# Altium PCB saw_filter_pcb.PcbDoc
Units mm, origin at the board's own origin, x right, y up, seen from the top; angles counter-clockwise.
Board outline 40.2 x 15.3 mm, 2 copper layers (Top Layer, Bottom Layer), stack 1.671 mm thick; 16 components, 10 nets, 46 pads, 94 vias.
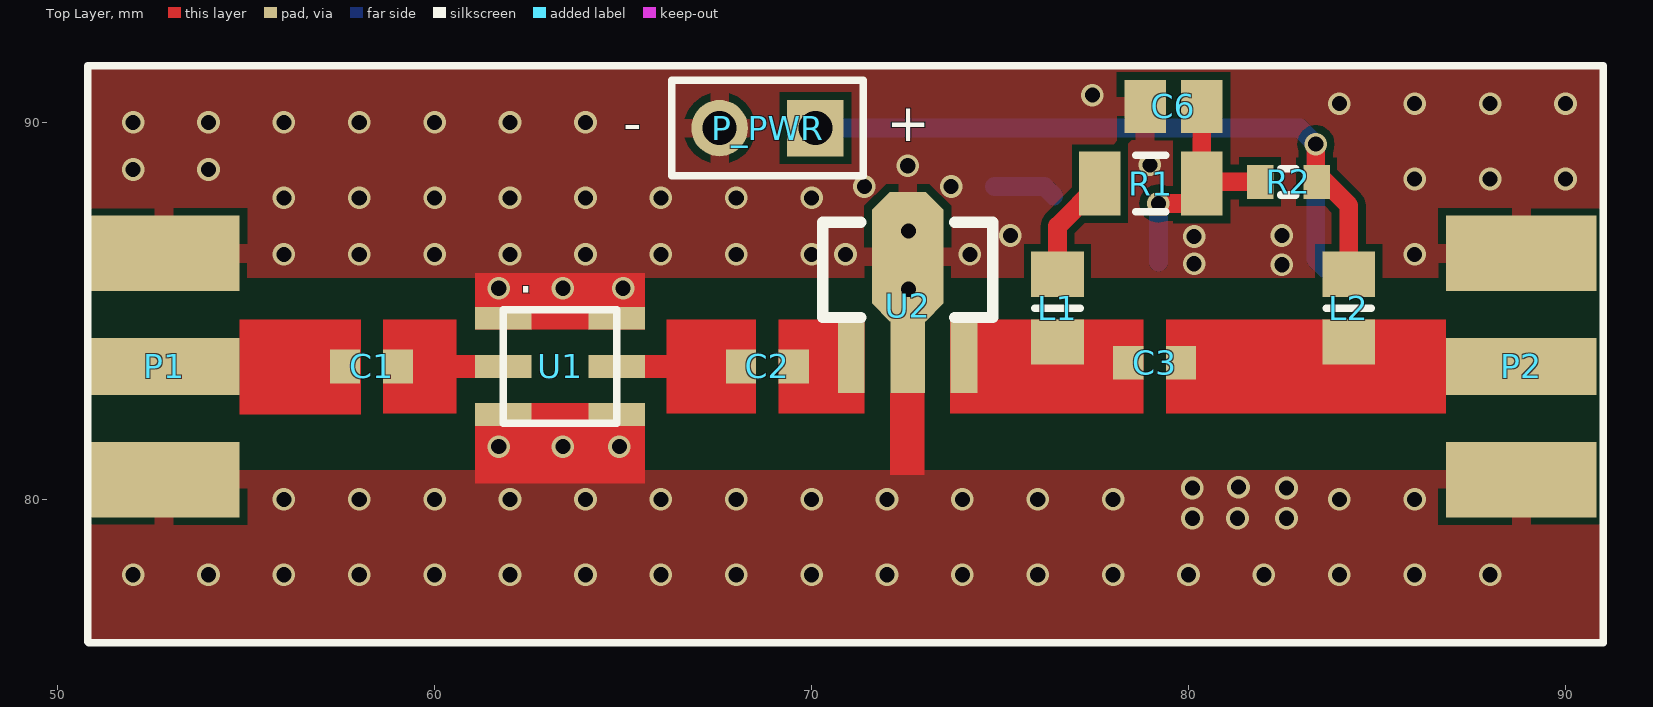
[diagram p0: Top Layer view]
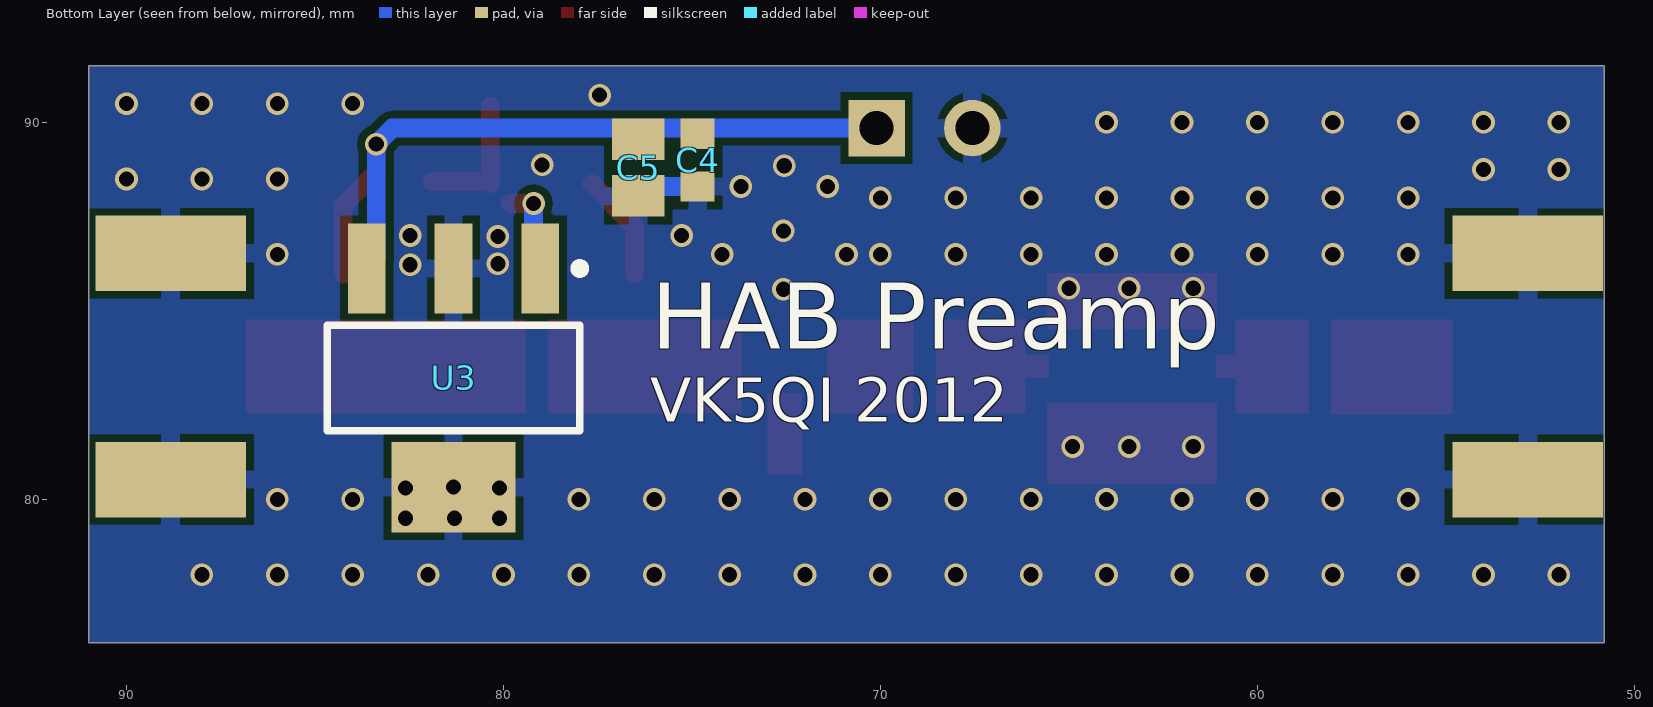
[diagram p1: Bottom Layer view, seen from below]

## Layer stack, top to bottom
Top Layer: signal copper 0.0356
Dielectric: core 1.6, FR-4, Dk 4.8
Bottom Layer: signal copper 0.0356

## Board outline
50.8,76.2 50.8,91.5 91,91.5 91,76.2

## Design rules (kind name [scope] priority, off if disabled: settings)
Clearance [All] p1: gap=0.2
ComponentClearance [All] p1 off: gap=0.254 collisioncheckmode=3 verticalgap=0.254 showdistances=FALSE
PolygonConnect PolygonConnect_1 [IsVia] p1: connectstyle=Direct reliefconductorwidth=0.254 reliefentries=4 polygonreliefangle="90 Angle"
PolygonConnect [All] p2: connectstyle=Relief reliefconductorwidth=0.5 reliefentries=4 polygonreliefangle="90 Angle"
RoutingVias [All] p1: holewidth=0.3 width=0.4 viastyle="Through Hole" minholewidth=0.711 minwidth=1.27 maxholewidth=0.711 maxwidth=1.27
SilkscreenOverComponentPads [All] p1: minsilkscreentomaskgap=0.254
SolderMaskExpansion [All] p1: expansion=0.102
Width [All] p1: maxlimit=5 minlimit=0.2 preferedwidth=0.2
26 further rules are at their usual default settings.

## Components (designator, comment, footprint, x,y, rotation, side; value= is the part's Value field where it differs from the comment)
C1 "Cap Semi" 1608[0603] 58.325,83.525 r0 top
C2 "Cap Semi" 1608[0603] 68.825,83.525 r0 top
C3 "Cap Semi" 1608[0603] 79.1,83.625 r0 top
C4 "Cap Semi" 1608[0603] 74.85,89 r90 bottom
C5 "Cap Pol3" C0805 76.425,88.8 r270 bottom
C6 "Cap Pol3" C0805 79.6,90.425 r180 top
L1 "BMB2A1000BN3" 6-0805_N 76.525,85.075 r90 top
L2 "BMB2A1000BN3" 6-0805_N 84.25,85.075 r90 top
P1 "SMA Con" SMA_EDGE 52.825,83.525 r90 top
P2 "SMA Con" SMA_EDGE 88.825,83.525 r270 top
P_PWR "Header 2" HDR1X2 70.1,89.85 r180 top
R1 "1206 500mW" C1206 79,88.375 r0 top
R2 "Res3" J1-0603 82.65,88.425 r180 top
U1 "DCC6C SAW Filter" DCC6C 63.325,83.525 r90 top
U2 "GALI74+" DF782 71.05,83.575 r0 top
U3 "MC78M08CDT" MP04A_N 81.325,83.225 r270 bottom

## Footprints (in the part's own frame and the unit in brackets; to place one, negate y for a bottom-side part, rotate by r counter-clockwise, add the part's x,y. Pads: shape width x height; smd on the part's side, far side on the other; paste and mask are expansions set on the pad)
6-0805_N [mm] "Chip Resistor, Body 2.0x1.2mm, IPC Medium Density"
  rect 1.2x1.4 smd: 1(-0.9,0) 2(0.9,0)
  silkscreen extent 0,-0.6 0,0.6, body extent -1.07,-0.7 1.07,0.7, height 0.7
1608[0603] [mm] "Chip Capacitor, Body 1.6x0.8mm, IPC High Density"
  rect 0.8x0.9 smd: 1(-0.7,0) 2(0.7,0)
  body extent -0.87,-0.48 0.87,0.48, height 1.3
C0805 [mm] "Chip Capacitor, Body 2.0x1.3mm, IPC High Density"
  rect 1.1x1.4 smd: 1(-0.75,0) 2(0.75,0)
  body extent -1.1,-0.72 1.1,0.72, height 1.4
C1206 [mm] "Chip Capacitor, Body 3.2x1.6mm, IPC High Density"
  rect 1.1x1.7 smd: 1(-1.35,0) 2(1.35,0)
  silkscreen extent -0.4,-0.75 0.4,0.75, body extent -1.7,-0.9 1.7,0.9, height 1.3
DCC6C [mm]
  rect 0.6x1.5 smd: 1(-1.275,1.5) 2(0,1.5) 3(1.275,1.5) 4(1.275,-1.5) 5(0,-1.5) 6(-1.275,-1.5)
  silkscreen extent -1.5,-1.5 1.5,1.5, body extent -1.5,-1.5 1.5,1.5, height 1.14
DF782 [mm] "UofA Lib Pavel"
  rect 0.711x2 smd: 1(0,0.25) 3(2.997,0.25)
  rect 0.914x2.413 smd: 2(1.499,0.45)
  oct 1.905x3.435 smd: 2(1.5,2.867)
  silkscreen extent -0.75,1.25 3.75,3.77, body extent -0.72,0.25 3.78,4.25, height 1.5
HDR1X2 [mm] "Connector; Header; 2 Position"
  rect 1.5x1.5 hole 0.9: 1(0,0)
  round 1.5 hole 0.9: 2(2.54,0)
  silkscreen extent -1.27,-1.27 3.81,1.27
J1-0603 [mm] "Chip Resistor, Body 1.6x0.8mm, IPC High Density"
  rect 0.7x0.9 smd: 1(-0.75,0) 2(0.75,0)
  silkscreen extent -0.2,-0.35 0.2,0.35, body extent -0.85,-0.48 0.85,0.48, height 0.9
MP04A_N [mm] "SOT223, 4-Leads, Body 6.5x3.5mm, Pitch 2.3mm, Lead Span 7mm, IPC Medium Density"
  rect 2.4x1 smd: 1(-2.9,2.3) 2(-2.9,0) 3(-2.9,-2.3)
  rect 2.4x3.3 smd: 4(2.9,0)
  silkscreen extent -3.02,-3.35 1.4,3.47, body extent -1.85,-3.35 1.85,3.35, height 1.8
SMA_EDGE [mm]
  rect 1.5x4 smd: 1(0,0)
  rect 2x4 smd: 2(-3,0) 2(3,0)
  rect 2x4 smd far side: 2(-3,0) 2(3,0)
  body extent -3.17,-1.73 3.18,11.6, height 3.56

## Part data
C1 C2 C3 C4: "Capacitor (Semiconductor SIM Model)"
C5 C6: "Polarized Capacitor (Surface Mount)"
L1 L2: library part Inductor, "Inductor"
P1 P2: "Power Connector"
P_PWR: "Header, 2-Pin"
R1: library part Res3, "Resistor"
R2: "Resistor"
U3: "Three-Terminal Medium Current Positive Voltage Regulator"

## Via types
v1: diameter 0.6, hole 0.4, Top Layer to Bottom Layer, tented both sides, 86 vias
v2: diameter 0.6, hole 0.4, Top Layer to Bottom Layer, 8 vias

## Nets (pads, with @x,y where several pads share a name; then routed paths per layer and width w, separated by ;. In a path a pad name is that pad's centre, name@x,y a point inside that pad or via, vN(x,y) a via of type N, cw(c..) or ccw(c..) an arc to the next point about the centre after c; other vN are vias at no path point)
GND: C4.1 C5.2 C6.2 P1.2 P2.2 P_PWR.2 U1.1 U1.3 U1.4 U1.6 U2.2 U3.2 U3.4 | length 1.7
  Bottom Layer w0.5: C4.1 76.175,88.3 C5.2
  other v1: 52,78 54,78 56,78 58,78 60,78 62,78 64,78 66,78 68,78 70,78 72,78 74,78 76,78 78,78 80,78 82,78 84,78 86,78 88,78 56,80 58,80 60,80 62,80 64,80 66,80 68,80 70,80 72,80 74,80 76,80 78,80 84,80 86,80 61.7,81.4 63.4,81.4 64.9,81.4 61.7,85.6 63.4,85.6 65,85.6 82.475,86.225 80.15,86.25 56,86.5 58,86.5 60,86.5 62,86.5 64,86.5 66,86.5 68,86.5 70,86.5 70.9,86.5 74.2,86.5 86,86.5 80.15,86.975 75.275,87 82.475,87 56,88 58,88 60,88 62,88 64,88 66,88 68,88 70,88 71.4,88.3 73.7,88.3 86,88.5 88,88.5 90,88.5 52,88.75 54,88.75 72.55,88.85 78.975,88.875 52,90 54,90 56,90 58,90 60,90 62,90 64,90 84,90.5 86,90.5 88,90.5 90,90.5 77.45,90.725
  other v2: 80.1,79.5 81.3,79.5 82.6,79.5 80.1,80.3 82.6,80.3 81.325,80.325 72.575,85.575 72.575,87.125
NetC1_1: C1.1 P1.1
NetC1_2: C1.2 U1.2
NetC2_1: C2.1 U1.5
NetC2_2: C2.2 U2.1
NetC3_1: C3.1 L1.1 U2.3
NetC3_2: C3.2 L2.1 P2.1
NetC4_2: C4.2 C5.1 L2.2 P_PWR.1 R2.1 U3.3 | length 20.7
  Top Layer w0.5: v1(83.375,89.425) 83.375,88.675 84.25,87.8 L2.2
  Bottom Layer w0.5: P_PWR.1 82.95,89.85 v1(83.375,89.425) 83.375,86.375 U3.3
NetC6_1: C6.1 R1.2 R2.2 U3.1 | length 5.8
  Top Layer w0.5: v1(79.2,87.85) R1.2@79.825,87.85 ; C6.1 R1.2 80.4,88.425 R2.2
  Bottom Layer w0.5: U3.1@79.2,86.3 v1(79.2,87.85)
NetL1_2: L1.2 R1.1 | length 2.9
  Top Layer w0.5: L1.2 76.525,87.25 R1.1

## Polygon pours and split planes (outlines as drawn)
GND on Bottom Layer "Top Layer-No Net" (solid, pour order 2): 50.8,76.225 50.8,91.5 91,91.5 91,76.2
GND on Top Layer "Top Layer-No Net" (solid, pour order 6): 50.8,91.475 50.8,85.875 56.15,85.875 91,85.875 90.975,85.9 90.975,91.475
GND on Top Layer "Top Layer-No Net" (solid, pour order 4): 50.8,76.2 50.8,80.775 91.025,80.775 91.025,76.221

## Other copper
Top Layer:
  rectangle net NetC1_2: 60.375,83.225 61.1,83.825
  rectangle net GND: 72.085,80.65 73,82.825
  rectangle net GND: 61.075,84.5 65.575,86
  rectangle net GND: 61.075,80.425 65.575,82.55
  rectangle net NetC3_2: 79.4,82.275 86.825,84.775
  rectangle net NetC1_1: 54.825,82.25 58.05,84.775
  rectangle net NetC3_1: 73.675,82.275 78.8,84.775
  rectangle net NetC1_2: 58.625,82.275 60.575,84.775
  rectangle net NetC2_1: 65.525,83.225 66.3,83.825
  rectangle net NetC2_1: 66.15,82.275 68.525,84.775
  rectangle net NetC2_2: 69.125,82.275 71.4,84.775
Bottom Layer:
  pour cut-out: 75.55,89.3 75.55,88.7 74.2,88.7 74.2,89.391

## Silkscreen, mask and mechanical layers (free items; w line width, h text height)
Top Overlay:
  lines w0.2: 50.8,76.225 50.825,76.2 91,76.2 91,91.5 50.8,91.5 50.8,76.225
  text "-" at 65,89.5 h1
  text "+" at 72,89.5 h1
  text "." at 62.2,85.475 h1
Bottom Overlay:
  text "HAB Preamp" at 76.075,83.425 h3
  text "VK5QI 2012" at 76.1,81.675 h2
Top Solder:
  rectangle: 79.4,82.275 86.825,84.775
  rectangle: 73.675,82.275 78.8,84.775
  rectangle: 72.075,80.775 73,82.725
  rectangle: 69.125,82.275 71.4,84.775
  rectangle: 66.15,82.275 68.525,84.775
  rectangle: 65.675,83.225 66.15,83.825
  rectangle: 60.5,83.225 60.975,83.825
  rectangle: 58.625,82.275 60.575,84.775
  rectangle: 54.825,82.25 58.05,84.775
Drill Drawing:
  text ".LEGEND" at 105.88,81.28 h1.52
  text "Drill Drawing." at 105.88,78.74 h1.52

## Dimensions
50.8,76.2 to 50.8,91.5 on Mechanical 1
50.8,76.2 to 91,76.2 on Mechanical 1